# Altium PCB dakPCBNew.PcbDoc
Units mil, origin at the board's own origin, x right, y up, seen from the top; angles counter-clockwise.
Board outline 4510 x 3460 mil, 2 copper layers (Top Layer, Bottom Layer); 48 components, 61 nets, 295 pads, 100 vias.
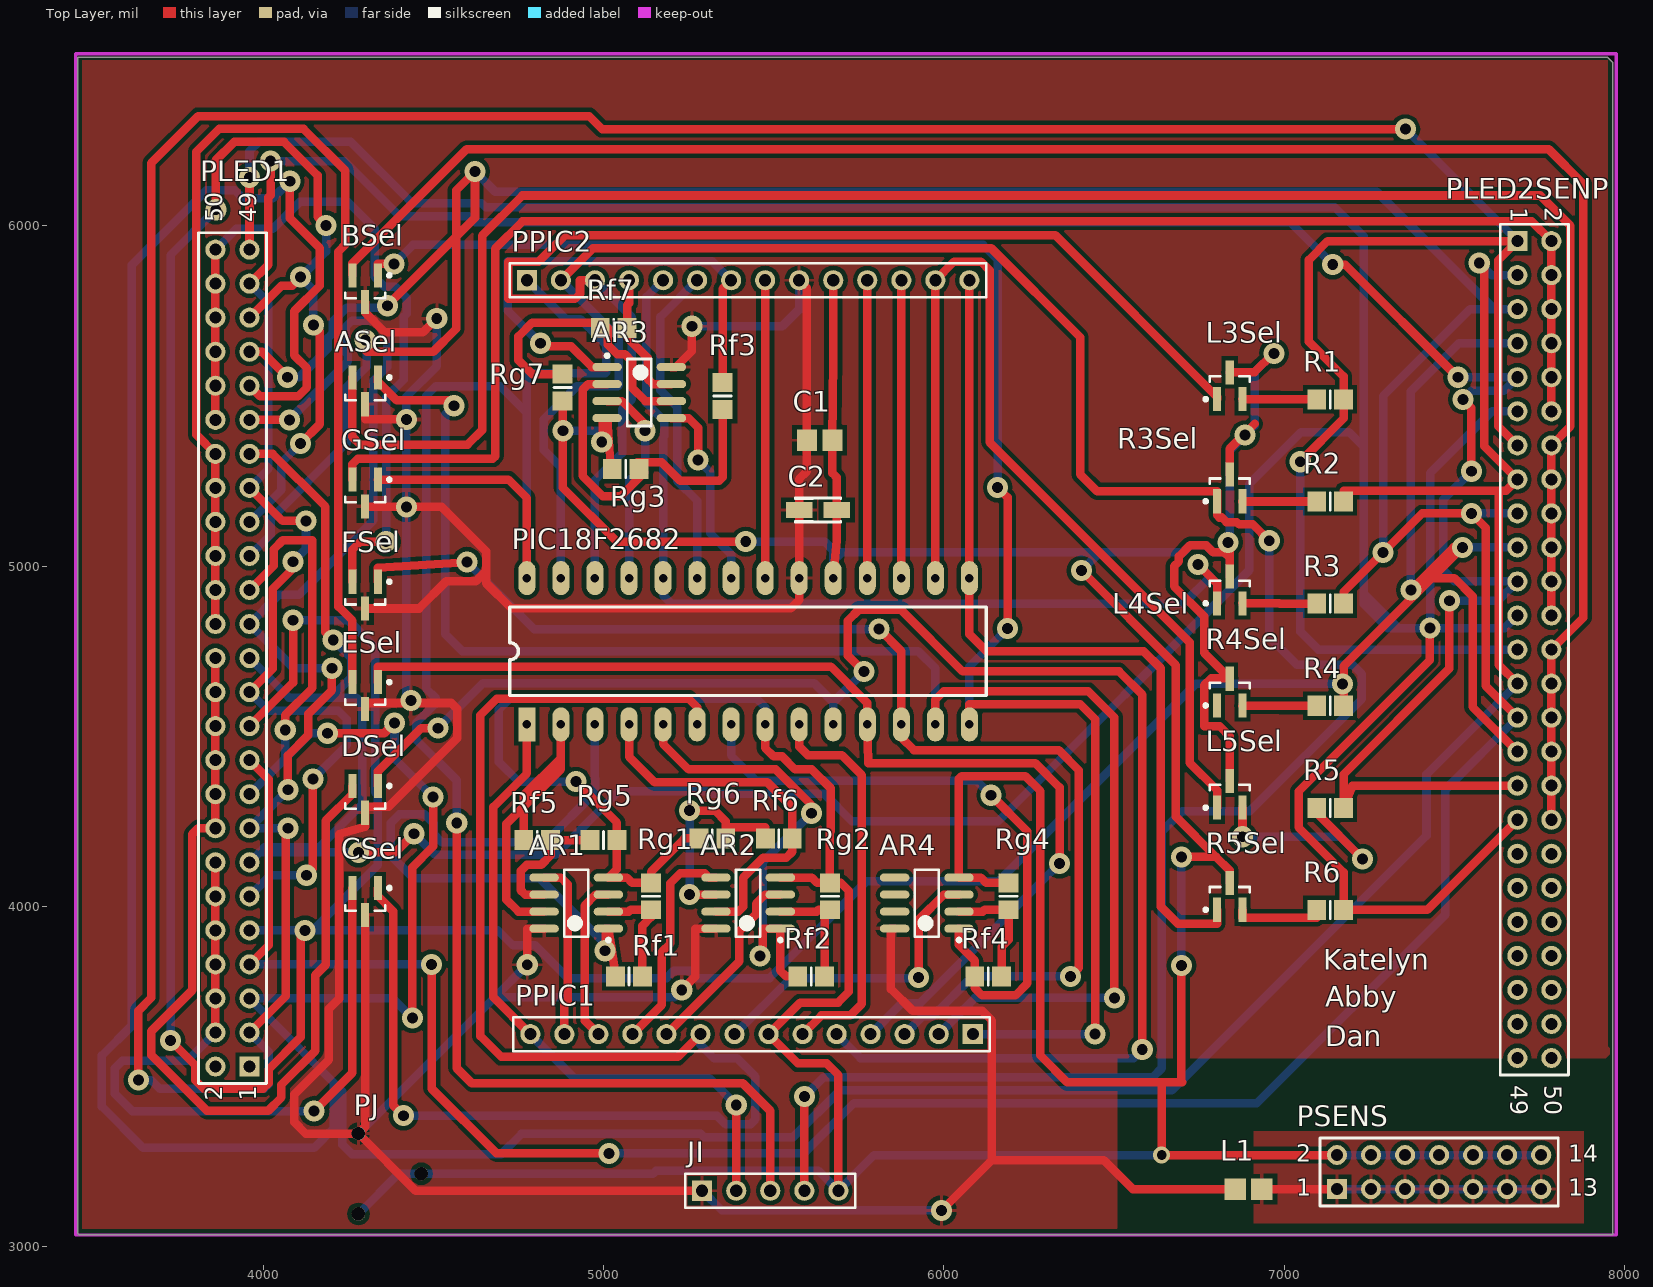
[diagram p0: Top Layer view]
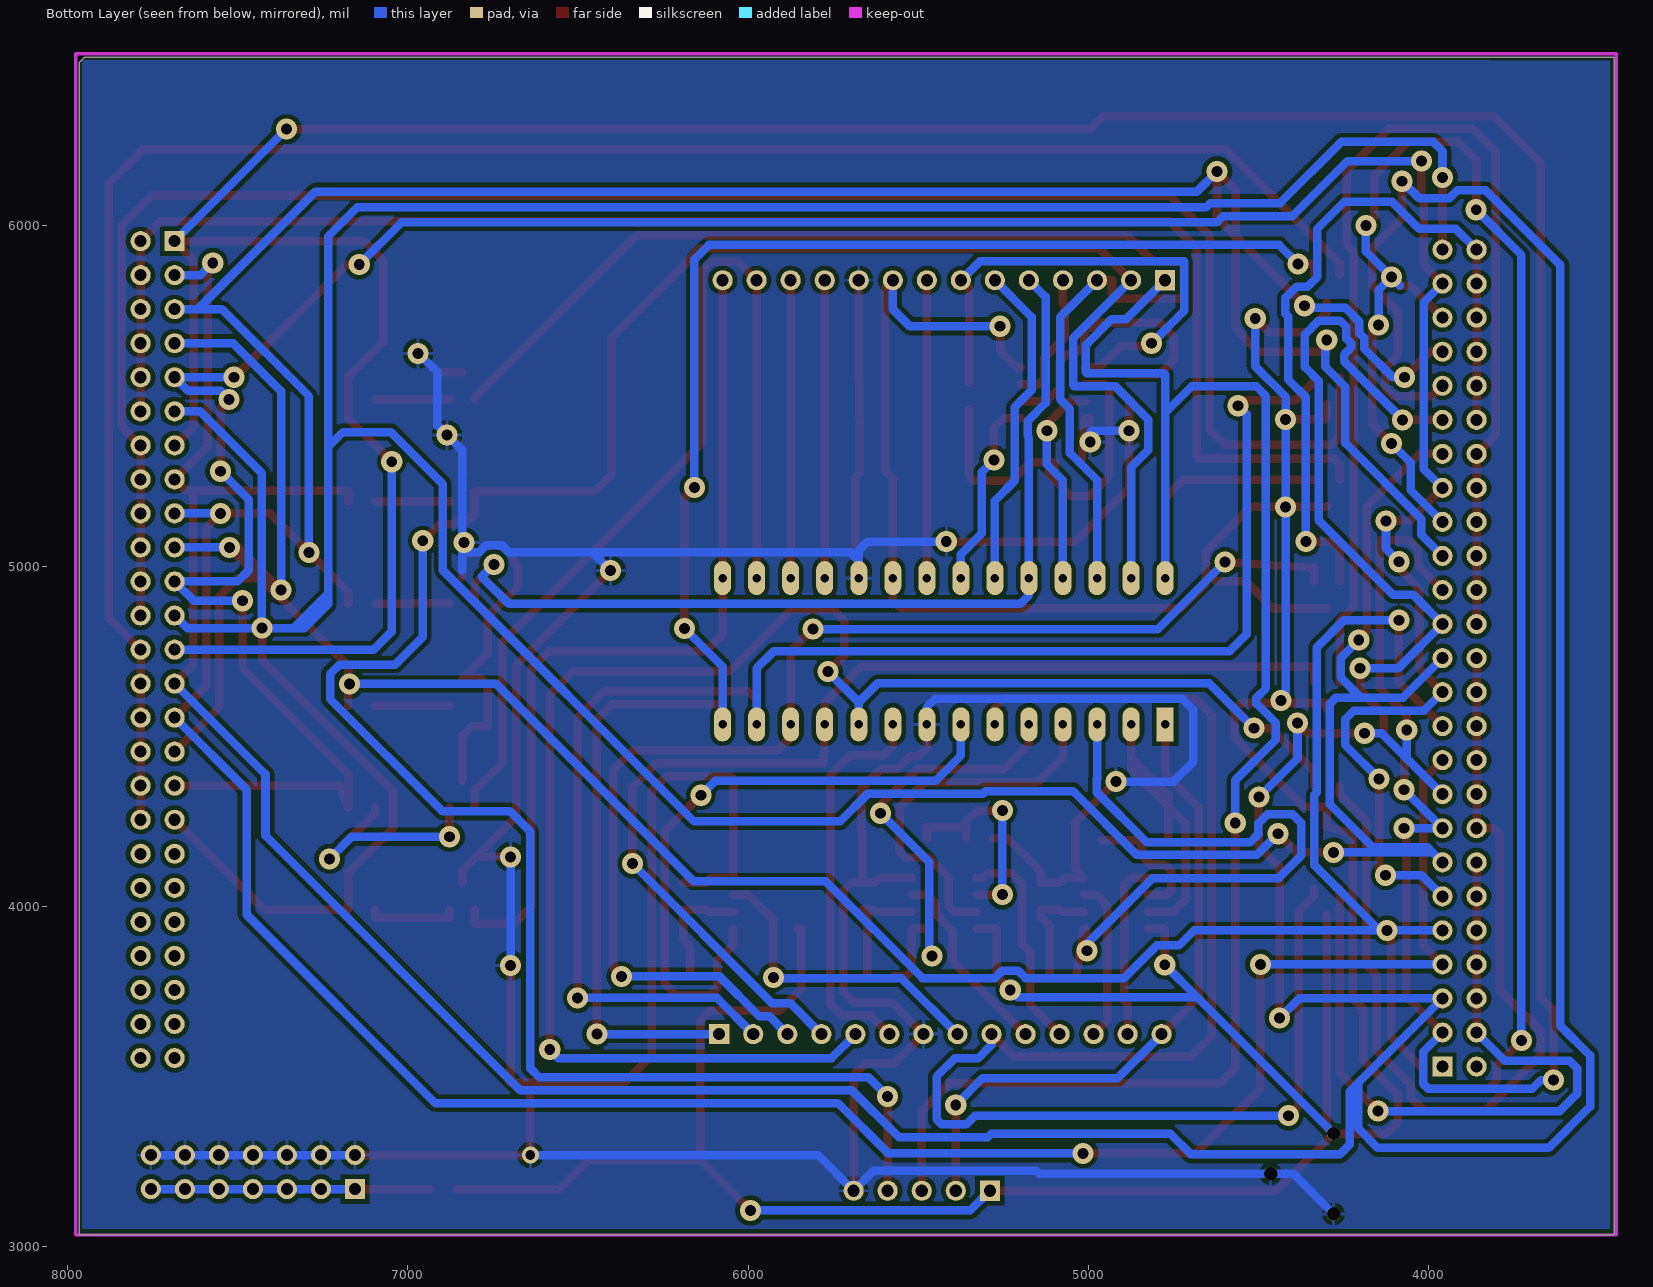
[diagram p1: Bottom Layer view, seen from below]

## Layer stack, top to bottom
Top Layer: signal copper 1.4
Dielectric: dielectric 12.6, FR-4, Dk 4.8
Bottom Layer: signal copper 1.4

## Board outline
3455,6495 3455,3040 3460,3035 7965,3035 7965,6480 7950,6495

## Design rules (kind name [scope] priority, off if disabled: settings)
Clearance [All] p1: gap=13
MinimumSolderMaskSliver [All] p1: minsoldermaskwidth=6
PolygonConnect [All] p1: connectstyle=Relief reliefconductorwidth=10 reliefentries=4 polygonreliefangle="90 Angle"
RoutingVias [All] p1: holewidth=32 width=62 viastyle="Through Hole" minholewidth=28 minwidth=50 maxholewidth=28 maxwidth=50
SilkscreenOverComponentPads [All] p1: minsilkscreentomaskgap=10
SolderMaskExpansion [All] p1: expansion=4
Width [All] p1: maxlimit=25 minlimit=12 preferedwidth=25
26 further rules are at their usual default settings.

## Components (designator, comment, footprint, x,y, rotation, side; value= is the part's Value field where it differs from the comment)
AR1 "Op Amp" SOIC127P600X175-8N 4920,4010 r180 top
AR2 "Op Amp" SOIC127P600X175-8N 5425,4010 r180 top
AR3 "Op Amp" SOIC127P600X175-8N 5105,5510 r0 top
AR4 "Op Amp" SOIC127P600X175-8N 5950,4010 r180 top
ASel "FDN306P, A" SOT23-3M 4300,5515 r270 top
BSel "FDN306P, B" SOT23-3M 4300,5815 r270 top
C1 "Cap" CAPC2012M 5635,5370 r180 top
C2 "Cap Pol1" TC3216-1206 5630,5165 r0 top
CSel "FDN306P, C" SOT23-3M 4300,4015 r270 top
DSel "FDN306P, D" SOT23-3M 4300,4315 r270 top
ESel "FDN306P, E" SOT23-3M 4300,4620 r270 top
FSel "FDN306P, F" SOT23-3M 4300,4915 r270 top
GSel "FDN306P, G" SOT23-3M 4300,5215 r270 top
JI "Programming Header" HDR1X5 5290,3165 r0 top
L1 "Inductor" INDC2012M 6895,3170 r180 top
L3Sel "FDN339AN, 3L" SOT23-3M 6840,5530 r90 top
L4Sel "FDN339AN, 4L" SOT23-3M 6840,4930 r90 top
L5Sel "FDN339AN, 5L" SOT23-3M 6840,4330 r90 top
PIC18F2682 "PIC18F2682" DIP28 4775,4535 r90 top
PJ "Power Jack" "BARREL JACK" 4280,3215 r180 top
PLED1 "50x2 Pin Header, PLED1" HDR2X25 3960,3530 r90 top
PLED2SENP "50x2 Pin Header, PLED2SENP" HDR2X25 7685,5955 r270 top
PPIC1 "Header 14" HDR1X14 6085,3625 r180 top
PPIC2 "Header 14" HDR1X14 4775,5840 r0 top
PSENS "Header 7X2" HDR2X7 7155,3170 r0 top
R1 "R1" RESC2012M 7135,5490 r180 top
R2 "R2" RESC2012M 7135,5190 r180 top
R3 "R3" RESC2012M 7135,4890 r180 top
R3Sel "FDN339AN, 3R" SOT23-3M 6840,5230 r90 top
R4 "R4" RESC2012M 7135,4590 r180 top
R4Sel "FDN339AN, 4R" SOT23-3M 6840,4630 r90 top
R5 "R5" RESC2012M 7135,4290 r180 top
R5Sel "FDN339AN, 5R" SOT23-3M 6840,4030 r90 top
R6 "R6" RESC2012M 7135,3990 r180 top
Rf1 "Rf1" RESC2012M 5075,3795 r180 top
Rf2 "Rf2" RESC2012M 5610,3795 r180 top
Rf3 "Rf3" RESC2012M 5350,5500 r90 top
Rf4 "Rf4" RESC2012M 6130,3795 r180 top
Rf5 "Rf5" RESC2012M 4805,4195 r0 top
Rf6 "Rf6" RESC2012M 5515,4200 r180 top
Rf7 "Rf7" RESC2012M 5030,5700 r180 top
Rg1 "Rg1" RESC2012M 5140,4030 r270 top
Rg2 "Rg2" RESC2012M 5665,4030 r90 top
Rg3 "Rg3" RESC2012M 5065,5285 r0 top
Rg4 "Rg4" RESC2012M 6190,4030 r270 top
Rg5 "Rg5" RESC2012M 5000,4195 r180 top
Rg6 "Rg6" RESC2012M 5320,4200 r0 top
Rg7 "Rg7" RESC2012M 4880,5525 r90 top

## Footprints (in the part's own frame and the unit in brackets; to place one, negate y for a bottom-side part, rotate by r counter-clockwise, add the part's x,y. Pads: shape width x height; smd on the part's side, far side on the other; paste and mask are expansions set on the pad)
"BARREL JACK" [mm]
  round 1 hole 1: 1(0,-3) 2(0,3) 3(-4.7,0)
CAPC2012M [mm] "Chip Capacitor, Body 2.0x1.3mm, IPC Low Density"
  rect 1.5x1.6 smd: 1(-0.95,0) 2(0.95,0)
  body extent -1.1,-0.72 1.1,0.72, height 1.1
DIP28 [mil]
  rect 100x50 hole 25: 1(0,0)
  oval 100x50 hole 25: 2(0,-100) 3(0,-200) 4(0,-300) 5(0,-400) 6(0,-500) 7(0,-600) 8(0,-700) 9(0,-800) 10(0,-900) 11(0,-1000) 12(0,-1100) 13(0,-1200) 14(0,-1300) 15(430,-1300) 16(430,-1200) 17(430,-1100) 18(430,-1000) 19(430,-900) 20(430,-800) 21(430,-700) 22(430,-600) 23(430,-500) 24(430,-400) 25(430,-300) 26(430,-200) 27(430,-100) 28(430,0)
  silkscreen extent 85,-1350 345,50
HDR1X5 [mm] "Connector; Header; 5 Position"
  rect 1.5x1.5 hole 0.9: 1(0,0)
  round 1.5 hole 0.9: 2(2.54,0) 3(5.08,0) 4(7.62,0) 5(10.16,0)
  silkscreen extent -1.27,-1.27 11.43,1.27
HDR1X14 [mm] "Connector; Header; 14 Position"
  rect 1.5x1.5 hole 0.9: 1(0,0)
  round 1.5 hole 0.9: 2(2.54,0) 3(5.08,0) 4(7.62,0) 5(10.16,0) 6(12.7,0) 7(15.24,0) 8(17.78,0) 9(20.32,0) 10(22.86,0) 11(25.4,0) 12(27.94,0) 13(30.48,0) 14(33.02,0)
  silkscreen extent -1.27,-1.27 34.29,1.27
HDR2X7 [mm] "Connector; Header; 7x2 Position"
  rect 1.5x1.5 hole 0.9: 1(0,0)
  round 1.5 hole 0.9: 2(0,2.54) 3(2.54,0) 4(2.54,2.54) 5(5.08,0) 6(5.08,2.54) 7(7.62,0) 8(7.62,2.54) 9(10.16,0) 10(10.16,2.54) 11(12.7,0) 12(12.7,2.54) 13(15.24,0) 14(15.24,2.54)
  silkscreen extent -1.27,-1.27 16.51,3.81
HDR2X25 [mm] "Connector; Header; 25x2 Position"
  rect 1.5x1.5 hole 0.9: 1(0,0)
  round 1.5 hole 0.9: 2(0,2.54) 3(2.54,0) 4(2.54,2.54) 5(5.08,0) 6(5.08,2.54) 7(7.62,0) 8(7.62,2.54) 9(10.16,0) 10(10.16,2.54) 11(12.7,0) 12(12.7,2.54) 13(15.24,0) 14(15.24,2.54) 15(17.78,0) 16(17.78,2.54) 17(20.32,0) 18(20.32,2.54) 19(22.86,0) 20(22.86,2.54) 21(25.4,0) 22(25.4,2.54) 23(27.94,0) 24(27.94,2.54) 25(30.48,0) 26(30.48,2.54) 27(33.02,0) 28(33.02,2.54) 29(35.56,0) 30(35.56,2.54) 31(38.1,0) 32(38.1,2.54) 33(40.64,0) 34(40.64,2.54) 35(43.18,0) 36(43.18,2.54) 37(45.72,0) 38(45.72,2.54) 39(48.26,0) 40(48.26,2.54) 41(50.8,0) 42(50.8,2.54) 43(53.34,0) 44(53.34,2.54) 45(55.88,0) 46(55.88,2.54) 47(58.42,0) 48(58.42,2.54) 49(60.96,0) 50(60.96,2.54)
  silkscreen extent -1.27,-1.27 62.23,3.81
INDC2012M [mm] "Chip Inductor, Body 2.0x1.2mm, IPC Low Density"
  rect 1.6x1.6 smd: 1(-1,0) 2(1,0)
  body extent -1.1,-0.7 1.1,0.7, height 1.1
RESC2012M [mm]
  rect 1.4x1.5 smd: 1(-1,0) 2(1,0)
  silkscreen extent 0,-0.65 0,0.65, body extent -1.07,-0.7 1.07,0.7, height 0.7
SOIC127P600X175-8N [mm] "SOIC, 8-Leads, Body 5.0x4.0mm (max), Pitch 1.27mm, IPC Medium Density"
  oval 2.2x0.6 smd: 1(-2.4,1.905) 2(-2.4,0.635) 3(-2.4,-0.635) 4(-2.4,-1.905) 5(2.4,-1.905) 6(2.4,-0.635) 7(2.4,0.635) 8(2.4,1.905)
  silkscreen extent -2.53,-2.5 0.9,2.88, body extent -2,-2.46 2,2.54, height 1.75
SOT23-3M [mm] "SOT23, 3-Leads, Body 2.9x1.3mm, Pitch 0.95mm, Lead Span 2.5mm, IPC Low Density"
  rect 1.8x0.6 smd: 1(-1,0.95) 2(-1,-0.95) 3(1,0)
  silkscreen extent -1.12,-1.5 0.7,1.93, body extent -0.7,-1.5 0.7,1.5, height 1.1
TC3216-1206 [mm] "Capacitor, SM Tantalum; Body 3.2 x 1.6 mm (LxW typ)"
  rect 2x1.2 smd: 1(-1.4,0) 2(1.4,0)
  silkscreen extent -1.7,-0.9 1.7,0.9

## Part data
AR1 AR2 AR3 AR4: "FET Operational Amplifier"
ASel BSel CSel DSel ESel FSel GSel: library part FDN304P, "Pch MOSFET"
C1: "Capacitor"
C2: "Polarized Capacitor (Radial)"
JI: library part "Header 5", "Header, 5-Pin"
L3Sel L4Sel L5Sel R3Sel R4Sel R5Sel: library part FDN339AN, "Nch MOSFET"
PPIC1 PPIC2: "Header, 14-Pin"
PSENS: "Header, 7-Pin, Dual row"
R1 R2 R3 R4 R5 R6 Rf1 Rf2 Rf3 Rf4 Rf5 Rf6 Rf7 Rg1 Rg2 Rg3 Rg4 Rg5 Rg6 Rg7: library part Res1, "Resistor"

## Via types
v1: diameter 62, hole 32, Top Layer to Bottom Layer, 99 vias
v2: diameter 50, hole 28, Top Layer to Bottom Layer, 1 vias

## Nets (pads, with @x,y where several pads share a name; then routed paths per layer and width w, separated by ;. In a path a pad name is that pad's centre, name@x,y a point inside that pad or via, vN(x,y) a via of type N, cw(c..) or ccw(c..) an arc to the next point about the centre after c; other vN are vias at no path point)
AIN: AR3.3 PIC18F2682.25 | length 611.1
  Top Layer w25: AR3.3 5054,5485 5122,5417 v1(5122,5398)
  Bottom Layer w25: PIC18F2682.25 5075,5252 5122,5299 v1(5122,5398)
AOUT: AR3.7 PPIC2.4 Rf7.1 | length 393.1
  Top Layer w25: PPIC2.4 5075,5772.63 5069.37,5767 Rf7.1 5069.37,5672.63 5130,5612 5130,5550 5145,5535 AR3.7
BIN: AR3.5 PIC18F2682.22 | length 572.3
  Top Layer w25: AR3.5 5250,5435 5278,5407 v1(5278,5312)
  Bottom Layer w25: v1(5278,5312) 5313,5277 5313,5097 5375,5035 PIC18F2682.22
BOUT: AR3.1 PPIC2.7 Rf3.2 | length 1482.3
  Top Layer w25: v1@4824,5646 4905,5646 4966,5585 AR3.1 ; Rf3.2 5350,5815 PPIC2.7
  Bottom Layer w25: v1@4814,5655 4719,5750 4719,5896 5319,5896 PPIC2.7
  other v1: 4815,5655
CIN: AR1.5 PPIC1.13 | length 521.9
  Top Layer w25: AR1.5 4875,4085 4895,4065 4895,3723 4885,3713 PPIC1.13
COUT: AR1.7 PIC18F2682.2 Rf5.1 | length 993.7
  Top Layer w25: Rf5.1 4765.63,4293.63 ; AR1.7 4750,3985 4714.51,4020.49 4714.51,4242.51 4765.63,4293.63 ; PIC18F2682.2 4875,4436.75 ; 4765.63,4293.63 4765.63,4327.38 4875,4436.75 ; 4765.63,4293.63 4875,4403 4875,4436.75
DIN: AR1.3 PPIC1.12 | length 477.3
  Top Layer w25: PPIC1.12 4945,3665 4945,4003 4977,4035 AR1.3
DOUT: AR1.1 PIC18F2682.3 Rf1.2 | length 1954.1
  Top Layer w25: v1@5006,3889 5006,3935 AR1.1 5021.09,3891.28 Rf1.2
  Bottom Layer w25: PIC18F2682.3 4975,4376 4976,4375 4976,4336 4829.5,4189.5 4524.52,4189.5 4501.52,4212.5 4501.52,4243.98 4475,4270.5 4400,4270.5 4375,4245.5 4375,4150 4442,4083 4812,4083 v1@5006,3889
  other v1: 5005,3870
EIN: AR2.5 PPIC1.11 | length 641
  Top Layer w25: PPIC1.11 5171,3711 5171,3866 5196.5,3891.5 5196.5,4069 5224.81,4097.31 5297.39,4097.31 5309.71,4085 AR2.5
EOUT: AR2.7 PIC18F2682.4 Rf6.1 | length 1113.6
  Top Layer w25: PIC18F2682.4 5075,4440 5150,4365 5481.24,4365 5554.37,4291.87 Rf6.1 5554.37,4160.87 5537.5,4144 5469.43,4144 5410,4084.57 5410,3999 5396,3985 AR2.7
FIN: AR2.3 PPIC1.10 | length 574.6
  Top Layer w25: PPIC1.10 5399.32,3839.32 5399.32,3928.32 5448.56,3977.56 5448.56,4008.56 5475,4035 AR2.3
FOUT: AR2.1 PIC18F2682.5 Rf2.2 | length 1324.7
  Top Layer w25: PIC18F2682.5 5175,4478 5250,4403 5506,4403 5611,4298 v1(5611,4274) ; v1@5468,3884 5468,3935 AR2.1@5519,3935 ; AR2.1 AR2.1@5519,3935 ; Rf2.2 5536.5,3795 5519,3812.5 AR2.1@5519,3935
  Bottom Layer w25: v1@5468,3884 5468,4131 v1(5611,4274)
  other v1: 5460,3855
GIN: AR4.3 PPIC1.8 | length 928.3
  Top Layer w25: v1(5926,3792) 5926,3961 6000,4035 AR4.3
  Bottom Layer w25: PPIC1.8 5549,3789 5923,3789 v1(5926,3792)
GND: AR1.4 AR2.4 AR3.4 AR4.4 C1.1 C2.2 JI.5 L3Sel.3 L4Sel.3 L5Sel.3 PIC18F2682.8 PIC18F2682.19 PJ.2 PJ.3 PPIC1.7 PPIC2.10 PSENS.2 PSENS.4 PSENS.6 PSENS.8 PSENS.10 PSENS.12 PSENS.14 R3Sel.3 R4Sel.3 R5Sel.3 Rg1.1 Rg2.2 Rg3.1 Rg4.1 Rg5.1 Rg6.1 Rg7.1 | length 17531.8
  Top Layer w25: v1(4881,5398) 4881,5485.63 Rg7.1 4880,5231 5039,5072 v1(5418,5072) ; v1(4919,4367) 5039.37,4246.63 Rg5.1 5039.37,4109.88 AR1.4 5069,4085 5084.63,4069.37 Rg1.1 5140,4102 5238,4200 Rg6.1 ; v1@4995,5355 4998,5358 4998,5435 AR3.4 5014,5390.24 Rg3.1@5020.63,5305 ; PIC18F2682.8 5475,4466 5500,4441 5525,4441 5563,4403 5612,4403 5667.5,4347.5 5667.5,4220.72 5665,4218.22 Rg2.2 ; AR2.4 5612,4085 5627.63,4069.37 Rg2.2 ; PIC18F2682.19 5685.12,5075.12 C2.2 5685.12,5261 5672.4,5273.72 C1.1 5675,5607.6 PPIC2.10 ; JI.5 5690,3504.69 5655.71,3538.97 5571.03,3538.97 PPIC1.7 5578.03,3718.03 5689.03,3718.03 5721,3750 5721,4046 5697.63,4069.37 Rg2.2 ; Rg4.1 6124.63,4069.37 6109,4085 AR4.4 6044,4085 6044,4375.5 6052,4383.5 6239,4383.5 6283.5,4339 6283.5,3562.5 6362,3484 6640,3484 ; v1(6404,4987) 6682,4709 6682,4264 6800,4146 ; 6698,3486 v1(6698,3827) ; v1(6698,4146) 6800,4146 ; 6700,3484 6640,3484 ; R5Sel.3 6840,4106 6800,4146 ; L5Sel.3 6840,4500 6811,4529 6765,4529 6765,4650 6785,4670 R4Sel.3@6840,4670 ; R4Sel.3 R4Sel.3@6840,4670 ; L4Sel.3 6840,5025 ; v1@6840,5066 6840,5025 ; R3Sel.3 6840,5345 6913,5418 ; L3Sel.3 6840,5570 6913,5570 6968,5625 v1(6970,5625) ; PSENS.2 v2(6640,3270) 6640,3484 ; R4Sel.3@6840,4670 6765,4745 6765,4852.19 6676.5,4940.69 6676.5,5000 6690.5,5014 6690.5,5028.4 6723.6,5061.5 6770.4,5061.5 6790.9,5041 6824,5041 6840,5025
  Bottom Layer w25: PJ.2 4398.11,3215 PJ.3 5145,3215 5154,3224 5631,3224 JI.5 5795,3270 v2(6640,3270) ; v1(4881,5398) 4989,5398 4998,5389 4995,5386 v1@4995,5355 ; v1(4919,4367) 4750,4367 4693,4424 4693,4579 4725,4611 5450,4611 5475,4586 PIC18F2682.8 ; v1(5418,5072) 5650,5072 5675,5047 5675,5016 ; PIC18F2682.19 5675,5016 ; v1(6404,4987) 6458,5041 ; v1(6698,3827) v1(6698,4146) ; v1@6835,5075 6835,5052 6824,5041 6790.9,5041 6770.4,5061.5 6723.6,5061.5 6703.1,5041 6458,5041 ; 6840,4988 6840,5340 6913,5413 ; 6913,5418 6913,5570 6968,5625 v1(6970,5625) ; PSENS.2 PSENS.4 PSENS.6 PSENS.8 PSENS.10 PSENS.12 PSENS.14 ; 5675,5016 5700,5041 6458,5041
  other v1: 6835,5070 4995,5365 6885,5385
GOUT: AR4.1 PIC18F2682.7 Rf4.2 | length 1871.8
  Top Layer w25: AR4.1 6044.49,3887.14 6090.63,3841 Rf4.2 6090.63,3760.87 6112.5,3739 6210,3739 6245.5,3774.5 6245.5,4220.5 v1(6139,4327)
  Bottom Layer w25: PIC18F2682.7 5375,4444.22 5450,4369.22 6096.78,4369.22 v1(6139,4327)
NetAR1_2: AR1.2 Rf1.1 Rg1.2 | length 334.1
  Top Layer w25: AR1.2 5074,3985 5079.63,3990.63 Rg1.2 5140,3969 5114.37,3943.37 Rf1.1
NetAR1_6: AR1.6 Rf5.2 Rg5.2 | length 398.6
  Top Layer w25: AR1.6 4769.7,4035 4756.7,4048 4756.7,4104.7 4775,4123 4817.37,4123 4844.37,4150 Rf5.2 Rg5.2
NetAR2_2: AR2.2 Rf2.1 Rg2.1 | length 359.1
  Top Layer w25: AR2.2 5626.37,3985 5632,3990.63 Rg2.1 5665,3986.56 5649.37,3986.56 Rf2.1
NetAR2_6: AR2.6 Rf6.2 Rg6.2 | length 643.9
  Top Layer w25: v1(5253,4035) AR2.6 ; v1(5253,4282) 5327.37,4282 5359.37,4250 5359.37,4233.5 ; Rg6.2 5359.37,4233.5 ; Rf6.2 5475.63,4233.5 5359.37,4233.5
  Bottom Layer w25: v1(5253,4035) v1(5253,4282)
NetAR3_2: AR3.2 Rf3.1 Rg3.2 | length 1074.9
  Top Layer w25: AR3.2 4955,5535 4938.5,5518.5 4938.5,5265 4998.5,5205 5050,5205 Rg3.2@5120,5275 ; Rg3.2@5099.37,5275 5099.37,5305 5171,5305 5225.5,5250.5 5339.5,5250.5 5350,5261 Rf3.1
NetAR3_6: AR3.6 Rf7.2 Rg7.2 | length 852.8
  Top Layer w25: Rg7.2 4790.63,5564.37 4750,5605 4750,5675 4790,5715 4975.63,5715 Rf7.2 5013,5700 5013,5650 5040,5623 5062.5,5623 5084,5601.5 5084,5524 5123,5485 AR3.6
NetAR4_2: AR4.2 Rf4.1 Rg4.2 | length 352
  Top Layer w25: AR4.2 6114,3985 6119.63,3990.63 Rg4.2 6190,3902.63 6169.37,3882 Rf4.1
NetASel_1: ASel.1 PIC18F2682.13 PPIC1.2 | length 4618.2
  Top Layer w25: ASel.1 4337.4,5542 4391.9,5487.5 4544.4,5487.5 v1(4560.5,5471.4) ; PIC18F2682.13 5975,4608 6000,4633 6423.84,4633 6501,4555.84 v1(6501,3731.5)
  Bottom Layer w25: v1(4560.5,5471.4) 4535.5,5446.4 4535.5,4800 4585.5,4750 5925,4750 5975,4700 PIC18F2682.13 ; PPIC1.2 6091.5,3731.5 v1(6501,3731.5)
NetASel_2: ASel.2 PLED2SENP.14 PLED2SENP.16 PLED2SENP.18 PLED2SENP.20 PLED2SENP.22 PLED2SENP.24 | length 5605.9
  Top Layer w25: ASel.2 4262.6,5506.6 4262,5506 4262,5380 4285,5357 4600.97,5357 4643.97,5400 4643.97,5971.03 4761.94,6089 7752,6089 7841,6000 7841,5411 PLED2SENP.14 PLED2SENP.16 PLED2SENP.18 PLED2SENP.20 PLED2SENP.22 PLED2SENP.24
NetBSel_1: BSel.1 PIC18F2682.14 PPIC1.1 | length 5052.6
  Top Layer w25: BSel.1 4337.4,5888 v1(4384,5888) ; PIC18F2682.14 6075,4595 6400,4595 6444.5,4550.5 v1(6444.5,3625) ; v1(6158,5231) 6187,5202 v1(6187,4817)
  Bottom Layer w25: v1(4384,5888) 4440,5944 6115,5944 6158,5901 v1(6158,5231) ; PIC18F2682.14 6075,4705 v1(6187,4817) ; PPIC1.1 v1(6444.5,3625)
NetBSel_2: BSel.2 PLED2SENP.26 PLED2SENP.28 PLED2SENP.30 PLED2SENP.32 PLED2SENP.34 PLED2SENP.36 | length 5739.9
  Top Layer w25: BSel.2 4262.6,5889.85 4597.75,6225 7777,6225 7879,6123 7879,4849 PLED2SENP.26 PLED2SENP.28 PLED2SENP.30 PLED2SENP.32 PLED2SENP.34 PLED2SENP.36
NetCSel_1: CSel.1 PIC18F2682.6 PPIC1.9 | length 4467.7
  Top Layer w25: CSel.1 4337.4,4031 4382,3986.4 4382,3416 v1(4412.5,3385.5) ; PIC18F2682.6 5275,4586 5250,4611 4687.05,4611 4638.51,4562.46 4638.51,3619.49 4700,3558 5218,3558 PPIC1.9
  Bottom Layer w25: v1(4412.5,3385.5) 5333.5,3385.5 5358.5,3360.5 5432,3360.5 5446.5,3375 5446.5,3500.5 5393,3554 5325,3554 5285,3594 PPIC1.9
NetCSel_2: CSel.2 PLED1.4 PLED1.6 PLED1.8 PLED1.10 PLED1.12 PLED1.14 | length 2223
  Top Layer w25: PLED1.4 PLED1.6 PLED1.8 PLED1.10 PLED1.12 PLED1.14 ; v1(4150,3399) 4262,3511 4262,4031 4262.6,4031 CSel.2
  Bottom Layer w25: PLED1.4 3776.5,3546.5 3586,3546.5 3564.5,3525 3564.5,3450 3615.5,3399 v1(4150,3399)
NetDSel_1: DSel.1 PIC18F2682.10 PPIC1.5 | length 4834.4
  Top Layer w25: DSel.1 4337.4,4397.4 4463.97,4523.97 v1(4513.97,4523.97) ; v1(5765,4690) 5718,4737 5718,4840 5750,4872 5874,4872 6055,4691 6514.92,4691 6583,4622.92 v1(6583,3580)
  Bottom Layer w25: v1(4513.97,4523.97) 4646,4656 5619,4656 5675,4600 ; PIC18F2682.10 5675,4600 ; PPIC1.5 5755,3555 6558,3555 v1(6583,3580) ; v1(5765,4690) 5675,4600
NetDSel_2: DSel.2 PLED1.16 PLED1.18 PLED1.20 PLED1.22 PLED1.24 PLED1.26 | length 2742.3
  Top Layer w25: PLED1.26 PLED1.24 PLED1.22 PLED1.20 PLED1.18 PLED1.16 3809.5,4230 3792,4212.5 3792,3754 3671.5,3633.5 3671.5,3563.5 3835,3400 4015,3400 4054,3439 4054,3477 4153,3576 4153,3798 4184,3829 4184,4252.4 4262.6,4331 DSel.2
NetESel_1: ESel.1 PIC18F2682.11 PPIC1.4 | length 3282.7
  Top Layer w25: ESel.1 4337.4,4705 5668,4705 5775,4598 PIC18F2682.11 5777.5,4421.5 6268.5,4421.5 6340,4350 v1(6340,4126.09)
  Bottom Layer w25: PPIC1.4 5876,3716 5929.91,3716 v1(6340,4126.09)
NetESel_2: ESel.2 PLED1.28 PLED1.30 PLED1.32 PLED1.34 PLED1.36 PLED1.38 | length 3455.1
  Top Layer w25: PLED1.28 PLED1.30 PLED1.32 PLED1.34 PLED1.36 PLED1.38 3804,5386 3804,6217.83 3870.67,6284.5 4119,6284.5 4241.5,6162 4241.5,5944.75 4221.11,5924.37 4221.11,4881.39 4262.6,4839.9 ESel.2
NetFSel_1: FSel.1 PIC18F2682.12 PPIC1.3 | length 3675.5
  Top Layer w25: FSel.1 4337.4,4994.9 v1(4599,5012) ; v1(5810,4815) 5875,4750 PIC18F2682.12 5875,4496.5 5912,4459.5 6337.5,4459.5 6397,4400 6397,3820 v1(6372,3795)
  Bottom Layer w25: v1(4599,5012) 4796,4815 v1(5810,4815) ; PPIC1.3 5938,3678 5968,3678 6085,3795 v1(6372,3795)
NetFSel_2: FSel.2 PLED1.40 PLED1.42 PLED1.44 PLED1.46 PLED1.48 PLED1.50 | length 2263.5
  Top Layer w25: PLED1.40 PLED1.42 PLED1.44 PLED1.46 PLED1.48 PLED1.50 ; FSel.2 4262.6,5048.6 4286,5072 v1(4361.5,5072)
  Bottom Layer w25: PLED1.50 3921,5991 4028.3,5991 4107.5,6070.2 4249.13,6070.2 4327.5,5991.83 4327.5,5850 4356,5821.5 4388.4,5821.5 4421.5,5788.4 4421.5,5741.6 4413.5,5733.6 4413.5,5548.27 4361.5,5496.27 v1(4361.5,5072)
NetGSel_1: GSel.1 JI.3 PIC18F2682.28 PPIC2.1 | length 5526
  Top Layer w25: GSel.1 4720.63,5254.37 4775,5200 PIC18F2682.28 ; v1(4569,4246) 4569,3525 4613,3481 5409,3481 5490,3400 JI.3
  Bottom Layer w25: v1(4569,4246) 4569,4370.99 4450.5,4489.49 4450.5,4540.4 4506.5,4596.4 4506.5,4613.4 4479,4640.9 4479,5500 4506.9,5527.9 4697.1,5527.9 4775,5450 ; PIC18F2682.28 4775,5450 ; PPIC2.1 4889,5726 4931.5,5726 5007.5,5650 5007.5,5570 5004.5,5567 4779,5567 4775,5563 4775,5450
NetGSel_2: GSel.2 PLED2SENP.2 PLED2SENP.4 PLED2SENP.6 PLED2SENP.8 PLED2SENP.10 PLED2SENP.12 | length 4744.7
  Top Layer w25: GSel.2 4262.6,5300 4278.6,5316 4675,5316 4681.97,5322.97 4681.97,5933 4761.97,6013 7727,6013 PLED2SENP.2 PLED2SENP.4 PLED2SENP.6 PLED2SENP.8 PLED2SENP.10 PLED2SENP.12
NetJI_2: JI.2 PIC18F2682.1 PPIC1.14 | length 1938.9
  Top Layer w25: PIC18F2682.1 4775,4391 4676.51,4292.51 4676.51,3733.49 PPIC1.14 ; JI.2 v1(5390,3417)
  Bottom Layer w25: PPIC1.14 4914,3496 5311,3496 v1(5390,3417)
NetJI_4: JI.4 PIC18F2682.27 PPIC2.2 R3Sel.1 | length 7360.7
  Top Layer w25: PPIC2.2 4969,5934 6139,5934 6400,5673 6400,5270 6450,5220 6802.6,5220 R3Sel.1 6802.6,5150 6809.6,5143 6816.74,5143 6830.04,5129.7 6860.21,5129.7 6867.4,5122.5 6908.1,5122.5 v1(6956,5074.6) ; JI.4 v1(5590,3442)
  Bottom Layer w25: PIC18F2682.27 4875,5290.39 4824.39,5341 4824.39,5431.33 4921.62,5528.56 5042.56,5528.56 5045.5,5531.5 5045.5,5669.5 PPIC2.2 ; v1(5590,3442) 5647,3499 6614,3499 6640,3525 6640,4220 6700,4280 6898,4280 7228,4610 7228,4683 7200,4711 7037,4711 6956,4792 v1(6956,5074.6)
NetL1_1: L1.1 PSENS.1 PSENS.3 PSENS.5 PSENS.7 PSENS.9 PSENS.11 PSENS.13 | length 820.6
  Top Layer w25: L1.1 PSENS.1
  Bottom Layer w25: PSENS.1 PSENS.3 PSENS.5 PSENS.7 PSENS.9 PSENS.11 PSENS.13
NetL3Sel_1: L3Sel.1 PIC18F2682.26 PPIC2.3 | length 3693.8
  Top Layer w25: PPIC2.3 4931,5840 4931,5799.97 4916,5784.97 4719.97,5784.97 4719.97,5895.03 4810.03,5895.03 4887,5972 6327.6,5972 6802.6,5497 L3Sel.1
  Bottom Layer w25: PIC18F2682.26 4975,5253 5054.5,5332.5 5054.5,5461.56 5083.5,5490.56 5083.5,5731.5 PPIC2.3
NetL3Sel_2: L3Sel.2 R1.2 | length 218.5
  Top Layer w25: L3Sel.2 6986,5490.63 6986.63,5490 R1.2
NetL4Sel_1: L4Sel.1 PIC18F2682.24 PPIC2.5 | length 2808.6
  Top Layer w25: v1(6747,5005) 6802.6,4949.4 L4Sel.1
  Bottom Layer w25: PPIC2.5 5126,5791 5126,5479 5178.5,5426.5 5178.5,5381.5 5175,5378 PIC18F2682.24 5175,4914.5 5200,4889.5 6703.5,4889.5 6783,4969 v1(6747,5005)
NetL4Sel_2: L4Sel.2 R3.2 | length 218.5
  Top Layer w25: L4Sel.2 6986,4890.63 6986.63,4890 R3.2
NetL5Sel_1: L5Sel.1 PIC18F2682.16 PPIC2.13 | length 2923.4
  Top Layer w25: PIC18F2682.16 PPIC2.13 6030.03,5895.03 6108.92,5895.03 6134.9,5869.06 6134.9,5363.69 6722,4776.59 6722,4422.6 6802.6,4342 L5Sel.1
NetL5Sel_2: L5Sel.2 R5.2 | length 670.8
  Top Layer w25: v1(6877.4,4205) L5Sel.2 ; R5.2 7095.63,4274.37 v1(7230,4140)
  Bottom Layer w25: v1(6877.4,4205) 7165,4205 v1(7230,4140)
NetPIC18F2682_9: PIC18F2682.9 PPIC1.6 | length 1166.6
  Top Layer w25: PIC18F2682.9 5575,4470 5600,4445 5700,4445 5759,4386 5759,3714.03 5725,3680.03 5640.03,3680.03 PPIC1.6
NetPIC18F2682_15: PIC18F2682.15 PPIC2.14 R5Sel.1 | length 2570.4
  Top Layer w25: PPIC2.14 PIC18F2682.15 6075,4800 6125,4750 6587,4750 6637,4700 6637,4000 6687,3950 6802.6,3950 R5Sel.1
NetPIC18F2682_17: PIC18F2682.17 PPIC2.12 | length 875
  Top Layer w25: PIC18F2682.17 PPIC2.12
NetPIC18F2682_18: PIC18F2682.18 PPIC2.11 | length 875
  Top Layer w25: PIC18F2682.18 PPIC2.11
NetPIC18F2682_21: PIC18F2682.21 PPIC2.8 | length 875
  Top Layer w25: PIC18F2682.21 PPIC2.8
NetPIC18F2682_23: PIC18F2682.23 PPIC2.6 | length 964.2
  Bottom Layer w25: PIC18F2682.23 5275,5192.5 5216.5,5251 5216.5,5467.5 5167.28,5516.72 5167.28,5732.28 PPIC2.6
NetPLED1_3: PLED1.3 PLED1.15 PLED1.27 PLED1.39 PLED2SENP.1 PLED2SENP.13 PLED2SENP.25 R1.1 | length 13934.2
  Top Layer w25: v1(3633.5,3490) 3633.5,3693.89 3671,3731.39 3671,6184 3809.5,6322.5 4957.5,6322.5 4996,6284 v1(7356,6284) ; PLED1.3 4066,3736 4066,4223 v1(4073,4230) ; PLED1.39 v1(4077,5430) ; v1(4073,4343) 4073,4444 4132.5,4503.5 4132.5,4566 4202,4635.5 v1(4202,4700) ; v1(7047,5306.63) 7174.37,5434 R1.1 7174.37,5557.63 7072.5,5659.5 7072.5,5900 7127.5,5955 PLED2SENP.1 7629.5,5899.5 7629.5,5410.5 PLED2SENP.13
  Bottom Layer w25: v1(3633.5,3490) 3671,3490 3696,3465 4003,3465 4016,3478 4016,3574 PLED1.3 ; v1(4073,4230) PLED1.15 v1(4073,4343) ; v1(4077,5430) 4248.5,5601.5 4248.5,5621.6 4228.5,5641.6 4228.5,5654.86 4242.5,5668.86 4242.5,5702.4 4261.6,5721.5 4323.4,5721.5 4364,5680.9 4364,5585 4323.5,5544.5 4323.5,5134.5 4105,4916 4046,4916 PLED1.27 4090,4700 v1(4202,4700) ; v1(7047,5306.63) 7047,4808 7100,4755 PLED2SENP.25 ; v1(7356,6284) PLED2SENP.1
NetPLED1_5: PLED1.5 PLED1.17 PLED1.29 PLED1.41 PLED2SENP.3 PLED2SENP.15 PLED2SENP.27 R2.1 | length 14416
  Top Layer w25: PLED1.29 4031.5,5001.5 4031.5,5050 4057.5,5076 4144,5076 4145,5075 4145,4642.25 4065,4562.25 v1(4065,4519) ; PLED1.41 3991.5,5498.5 4102,5498.5 4128.5,5525 4128.5,5582.12 4091.5,5619.12 4091.5,5749 4167,5824.5 4167,5933.9 4078.5,6022.4 v1(4078.5,6131) ; v1(4189,4509) 4356,4509 v1(4386,4539) ; v1(4439,3672) 4438,3673 4438,4115.15 4499.5,4176.65 v1(4499.5,4321.5) ; R2.1 7174.37,5221.7 7629.63,5221.7 ; v1(7573,5891) 7588,5876 7588,5352 PLED2SENP.15 7659.5,5229.5 7651.7,5221.7 7629.63,5221.7 ; PLED2SENP.27 7629.63,4710.37 7629.63,5221.7
  Bottom Layer w25: PLED1.17 4065,4435 ; v1(4065,4519) 4065,4435 ; v1(4078.5,6131) 4028.5,6081 3940,6081 3917,6104 3833,6104 3614,5885 3614,3650 3526.5,3562.5 3526.5,3412.5 3648,3291 4150,3291 4207,3348 4207,3483 ; v1(4189,4509) 4139,4509 4065,4435 ; v1(4386,4539) 4386,4435 v1(4499.5,4321.5) ; v1(4439,3672) 4381,3730 PLED1.5 4207,3483 ; v1(7573,5891) 7609,5855 PLED2SENP.3 ; PLED2SENP.27 7418,4388 7418,4208.5 6670,3460.5 5695.7,3460.5 5557.7,3322.5 5295.5,3322.5 5286,3332 4759,3332 4699,3272 4261,3272 4233,3300 4233,3457 4207,3483
NetPLED1_7: PLED1.7 PLED1.19 PLED1.31 PLED1.43 PLED2SENP.5 PLED2SENP.17 PLED2SENP.29 R3.1 | length 13635.1
  Top Layer w25: PLED1.7 4016,3886 4016,4374 PLED1.19 ; PLED1.43 3997,5630 v1(4072,5555) ; v1(4300,5665) 4300,5635 4305,5630 4500,5630 4567,5697 4567,5968 ; v1(4365,5765) 4364,5765 4567,5968 ; v1(4495,3830) 4495.5,3829.5 4495.5,3464.89 4685.39,3275 v1(5016,3275) ; R3.1 7174.37,4924.24 v1(7290.5,5040.37) 7405.13,5155 v1(7550,5155) 7591.5,5113.5 7591.5,4648.5 PLED2SENP.29 ; 4567,5968 4567,6104 v1(4622.5,6159.5) 4622.5,6023.5 4567,5968
  Bottom Layer w25: PLED1.7 v1(4495,3830) ; PLED1.31 4023,5093 4023,5139.26 4245.38,5361.64 4245.38,5526.85 4305,5586.47 4305,5660 v1(4300,5665) ; v1(4072,5555) 4106,5555 4190.5,5639.5 4190.5,5670.6 4204.5,5684.6 4204.5,5718.14 4245.86,5759.5 4339.14,5759.5 4340.64,5758 4358,5758 v1(4365,5765) ; v1(4622.5,6159.5) 4682,6100 7272,6100 7617,5755 ; v1(5016,3275) 5588.53,3275 5736.03,3422.5 6919.79,3422.5 7473,3975.71 7473,4343 PLED2SENP.29 ; v1(7290.5,5040.37) 7290.5,5499.5 7546,5755 7617,5755 ; v1(7550,5155) PLED2SENP.17 ; PLED2SENP.5 7617,5755
NetPLED1_9: PLED1.9 PLED1.21 PLED1.33 PLED1.45 PLED2SENP.7 PLED2SENP.19 PLED2SENP.31 R4.1 | length 13063.3
  Top Layer w25: v1(3728,3606) 3800,3534 3800,3490 3825,3465 4000,3465 4016,3481 4016,3521.56 4110.75,3616.31 4110.75,3917.75 v1(4123,3930) ; v1(3861,6047) 3861,6192.38 3915.12,6246.5 4061.5,6246.5 4160,6148 4160,6026 v1(4185,6001) ; PLED1.21 4088,4658 v1(4088,4841) ; PLED1.45 4054,5824 4085,5824 v1(4110,5849) ; v1(4110,5360.5) 4166.5,5417 4166.5,5689.5 v1(4148,5708) ; v1(7171,4654) v1@7174.37,4650.63 ; R4.1 v1@7174.37,4650.63 ; v1(7372,4930) 7497,5055 v1(7523.5,5055) 7433.5,4965 ; PLED2SENP.31 7553.5,4586.5 7553.5,4911.5 7500,4965 7433.5,4965 ; v1@7174.37,4650.63 7174.37,4705.87 7433.5,4965
  Bottom Layer w25: v1(3728,3606) 3728,5914 v1(3861,6047) ; PLED1.9 v1(4123,3930) v1@4145.06,3930 ; PLED1.33 4054,5224 4054,5304.5 v1(4110,5360.5) ; 4085,5824 v1(4110,5849) ; v1(4088,4841) 4250,4841 4329,4762 4329,4335.3 4336.5,4327.8 4336.5,4121.44 v1@4145.06,3930 ; v1(4148,5708) 4148,5811 v1(4110,5849) ; v1(4185,6001) 4185,5924 v1(4110,5849) ; v1(7171,4654) 6740,4654 6160,4074 5772,4074 5488,3790 5274.96,3790 5253.46,3811.5 5206.65,3811.5 5185.15,3790 4895.01,3790 4799.4,3885.61 4734.39,3885.61 4690,3930 v1@4145.06,3930 ; v1(7372,4930) 7372,5514 7513,5655 PLED2SENP.7 ; v1(7523.5,5055) PLED2SENP.19
NetPLED1_11: PLED1.11 PLED1.23 PLED1.35 PLED1.47 PLED2SENP.9 PLED2SENP.21 PLED2SENP.33 R5.1 | length 9235.5
  Top Layer w25: PLED1.23 4029,4699 4029,4934 4088,4993 v1(4088,5013) ; PLED1.35 4057,5133 v1(4126,5133) ; PLED1.47 4015.5,5885.5 4015.5,6083.5 4022,6090 v1(4022,6190) ; v1(4127,4092) 4146,4111 v1(4146,4375) ; v1(7142.5,5886) 7179,5886 v1(7510,5555) ; v1(7485,4898.5) 7485,4699 7174.37,4388.37 R5.1 7200,4355 PLED2SENP.33 ; v1(7525,5490) 7550,5465 v1(7550,5279)
  Bottom Layer w25: PLED1.11 4022,4092 v1(4127,4092) ; PLED1.23 4014.5,4575.5 4220.5,4575.5 4246,4550 4246,4475 v1(4146,4375) ; PLED1.35 4015.5,5285.5 4015.5,5774.5 PLED1.47 ; v1(4022,6190) 4239.53,6190 4401.03,6028.5 4604.5,6028.5 4623,6010 7018.5,6010 v1(7142.5,5886) ; v1(4088,5013) 4126,5051 v1(4126,5133) ; v1(7485,4898.5) 7628.5,4898.5 PLED2SENP.21 7500,4955 7467,4988 7467,5196 v1(7550,5279) ; v1(7510,5555) PLED2SENP.9 7645,5515 7550,5515 v1(7525,5490)
NetPLED1_13: PLED1.13 PLED1.25 PLED1.37 PLED1.49 PLED2SENP.11 PLED2SENP.23 PLED2SENP.35 R6.1 | length 13895.5
  Top Layer w25: PLED1.37 4028,5330 4183,5175 4183,4806 v1(4206,4783) ; PLED1.49 v1(3960,6142) ; v1(4280,4159) 4388,4159 v1(4443,4214) ; v1(7428,4818) 7428,4724 7042,4338 7042,4232.37 7174.37,4100 R6.1 7420,3990 PLED2SENP.35
  Bottom Layer w25: PLED1.13 3989,4159 ; PLED1.25 4076,4614 4200,4613.5 ; v1(3960,6142) 3960,6219.5 3987,6246.5 4257.34,6246.5 4437.34,6066.5 4642.06,6066.5 4653.56,6055 7148,6055 7234,5969 7234,5350 ; v1(4206,4783) 4259,4730 4259,4673 4200,4613.5 ; v1(4280,4159) 3989,4159 ; v1(4443,4214) 4505.5,4151.5 4858.5,4151.5 5046,4339 5302.22,4339 5310,4331.22 5648.78,4331.22 5730,4250 6159,4250 6897,4988 6897,5241 7050,5394 7190,5394 7234,5350 ; PLED2SENP.23 7648,4818 v1@7428.5,4818 ; PLED2SENP.11 7610.5,5455 7428.5,5273 v1@7428.5,4818 ; 3989,4159 4003.5,4173.5 4164.5,4173.5 4291,4300 4291,4596 4273.5,4613.5 4200,4613.5 ; 7234,4919 7234,4888 7304,4818 7335,4818 ; 7234,4919 7335,4818 ; 7234,4919 7234,5350 ; 7335,4818 v1(7428,4818) v1@7428.5,4818
NetR2_2: R2.2 R3Sel.2 | length 218.9
  Top Layer w25: R3Sel.2 6877.4,5190 R2.2
NetR4_2: R4.2 R4Sel.2 | length 218.5
  Top Layer w25: R4Sel.2 6986,4590.63 6986.63,4590 R4.2
NetR5Sel_2: R5Sel.2 R6.2 | length 264.9
  Top Layer w25: R5Sel.2 6877.4,3967 7095.63,3967 R6.2
VCC: AR1.8 AR2.8 AR3.8 AR4.8 ASel.3 BSel.3 C1.2 C2.1 CSel.3 DSel.3 ESel.3 FSel.3 GSel.3 JI.1 L1.2 PIC18F2682.20 PJ.1 PPIC2.9 | length 13044.7
  Top Layer w25: CSel.3 4300,3353.11 PJ.1 ; ESel.3 4300,4598 v1@4428,4598 ; FSel.3 4458.13,4875.63 4538,4955.5 4625,4955.5 4655.5,4986 ; GSel.3 4300,5174 v1(4421,5174) 4525,5174 4655.5,5043.5 4655.5,4986 ; ASel.3 4300,5431 v1(4421,5431) ; BSel.3 4300,5744.9 4357.9,5687 4469,5687 v1(4510,5728) ; v1@4423,4596 4426,4596 v1@4428,4598 ; v1(4435,4605) v1@4428,4598 ; v1(4776,3829.11) 4776,3935 AR1.8 ; AR3.8 5213,5585 5260,5632 v1(5260,5705) ; v1(5230.06,3755) 5269,3793.94 5269,3935 AR2.8 ; JI.1 4448.11,3165 PJ.1 ; PPIC2.9 5597.6,5817.4 C1.2 5597.6,5278.72 5574.88,5256 C2.1 5574.88,5065.12 PIC18F2682.20 5575,4901 5550,4876 4729.5,4876 4655.5,4950 4655.5,4986 ; AR4.8 5844.5,3935 5844.5,3757.5 5908.38,3693.62 6112.38,3693.62 6141,3665 6141,3255 ; v1(5993,3107) 6141,3255 ; L1.2 6555,3170 6470,3255 6141,3255 ; PJ.1 4125,3333.11 4092,3366.11 4092,3448.5 4193.5,3550 4193.5,3699.5 4223,3729 4223,4212.87 4300,4234.64 DSel.3 4300,4293 4368.5,4293 4570.47,4494.97 4570.47,4580.47 4552.94,4598 v1@4428,4598
  Bottom Layer w25: PJ.1 4680.01,3733.12 ; v1@4421,4619 v1(4421,5174) v1(4421,5431) 4421,5498 4510,5587 v1(4510,5728) ; v1@4429,4590 4446.36,4590 4448.18,4591.82 v1(4435,4605) ; v1(4776,3829.11) 4680.01,3733.12 ; v1(5230.06,3755) 5208.17,3733.12 4680.01,3733.12 ; v1(5260,5705) 5525,5705 5575,5755 PPIC2.9 ; JI.1 5348,3107 v1(5993,3107)
pads on no net: AR4.5 AR4.6 AR4.7 PLED1.1 PLED1.2 PLED2SENP.37 PLED2SENP.38 PLED2SENP.39 PLED2SENP.40 PLED2SENP.41 PLED2SENP.42 PLED2SENP.43 PLED2SENP.44 PLED2SENP.45 PLED2SENP.46 PLED2SENP.47 PLED2SENP.48 PLED2SENP.49 PLED2SENP.50 R4Sel.1

## Polygon pours and split planes (outlines as drawn)
VCC on Top Layer "Top Layer-No Net" (solid, pour order 9): 3450,6505 3450,3050 6495,3050 6500,3045 6510,3055 6510,3555 7945,3555 7965,3575 7950,3590 7950,6505
NetL1_1 on Top Layer "Top Layer-No Net" (solid, pour order 2): 6910,3340 7880,3340 7880,3070 6910,3070
GND on Bottom Layer "Top Layer-No Net" (solid, pour order 5): 3450,6485 3450,3045 7965,3045 7975,3035 7960,3050 7960,6505

## Keep-outs
Keep-Out Layer:
  lines w10: 3450,3035 3450,6505 7975,6505 7975,3035 3450,3035

## Silkscreen, mask and mechanical layers (free items; w line width, h text height)
Top Overlay:
  text "Katelyn" at 7115,3815 h60
  text "Abby" at 7120,3705 h60
  text "Dan" at 7120,3590 h60

## Dimensions
3450,3035 to 3450,6505 on Mechanical 1
3450,3035 to 7975,3035 on Mechanical 1

## Text inside footprints (layer, text, board x,y; h text height)
PLED1: Top Overlay "2" at 3880,3430 h50 r90; Top Overlay "1" at 3980,3430 h50 r90; Top Overlay "49" at 3980,6010 h50 r90; Top Overlay "50" at 3880,6010 h50 r90
PLED2SENP: Top Overlay "2" at 7765,6055 h50 r270; Top Overlay "1" at 7665,6055 h50 r270; Top Overlay "49" at 7665,3475 h50 r270; Top Overlay "50" at 7765,3475 h50 r270
PSENS: Top Overlay "2" at 7035,3250 h50; Top Overlay "1" at 7035,3150 h50; Top Overlay "14" at 7835,3250 h50; Top Overlay "13" at 7835,3150 h50